# Altium PCB DevBoard.PcbDoc
Units mil, origin at the board's own origin, x right, y up, seen from the top; angles counter-clockwise.
Board outline 1377.95 x 1377.95 mil, 2 copper layers (Top, Bottom), stack 60.402 mil thick; 31 components, 23 nets, 150 pads, 24 vias.
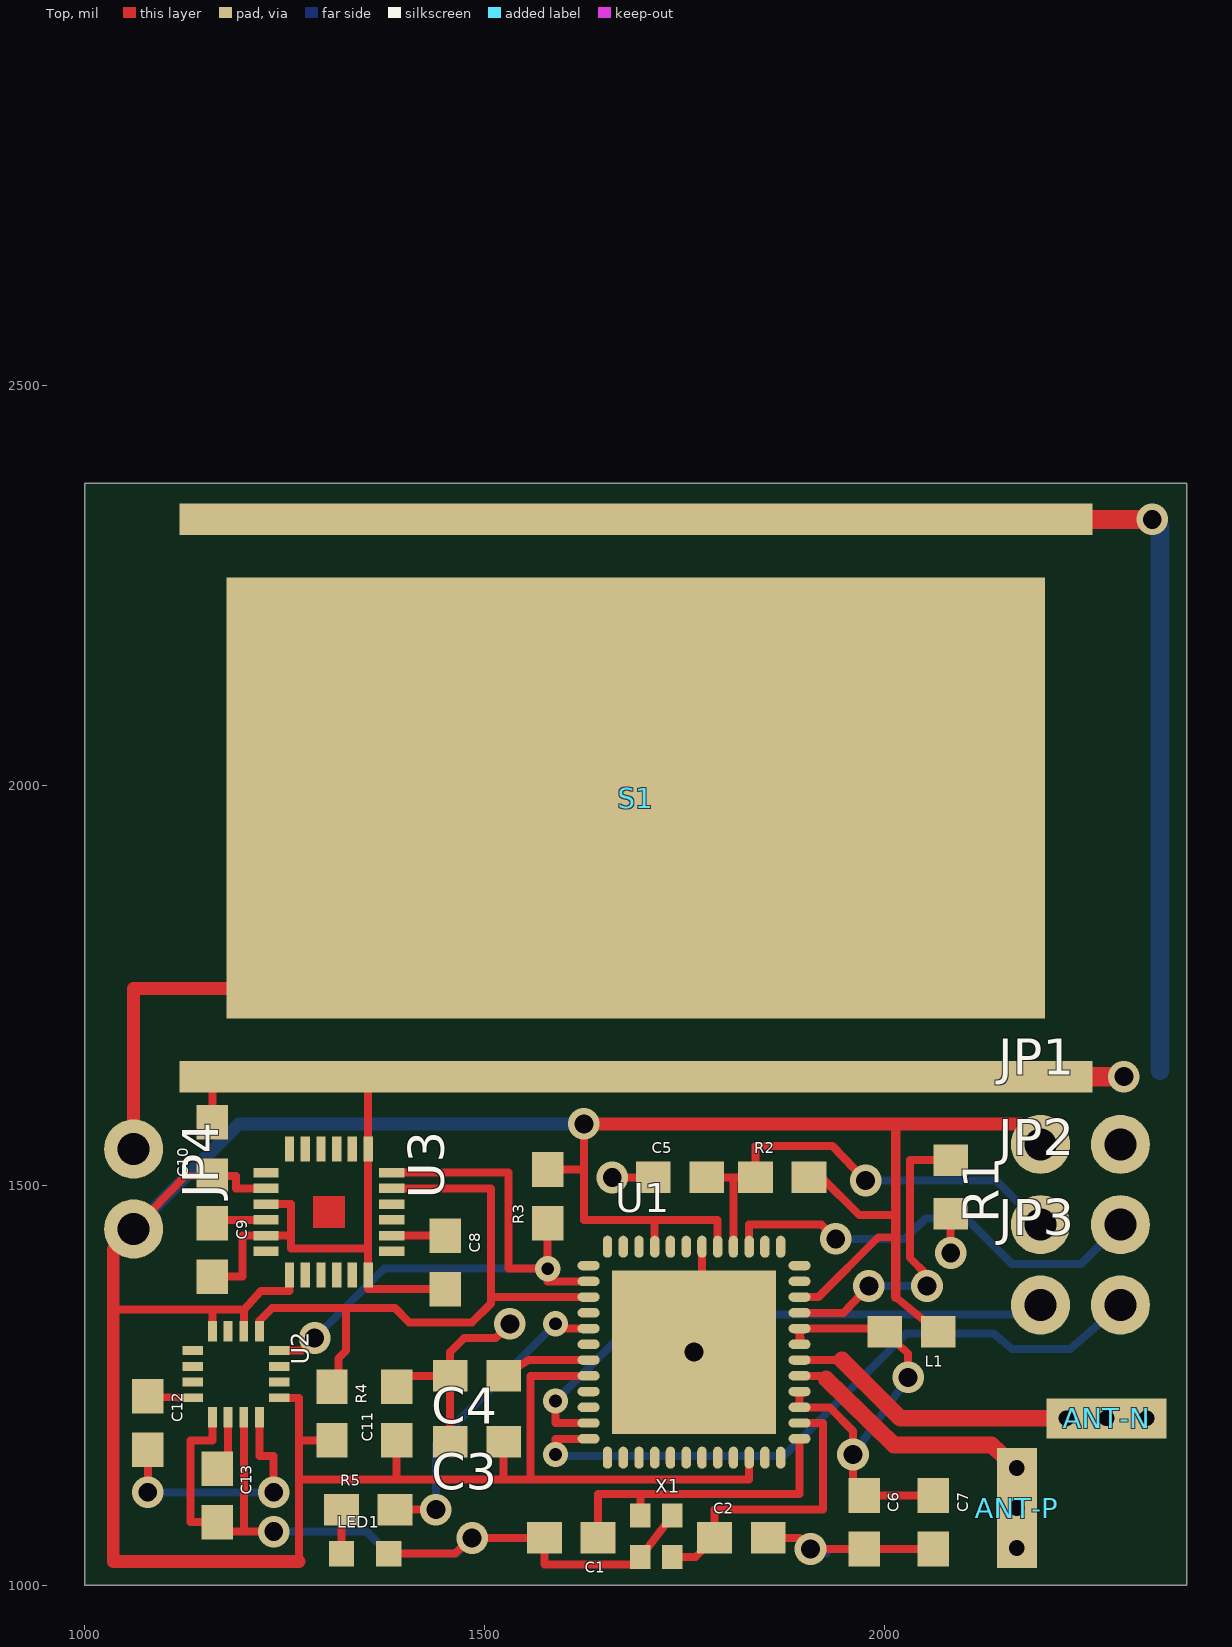
[diagram p0: Top view]
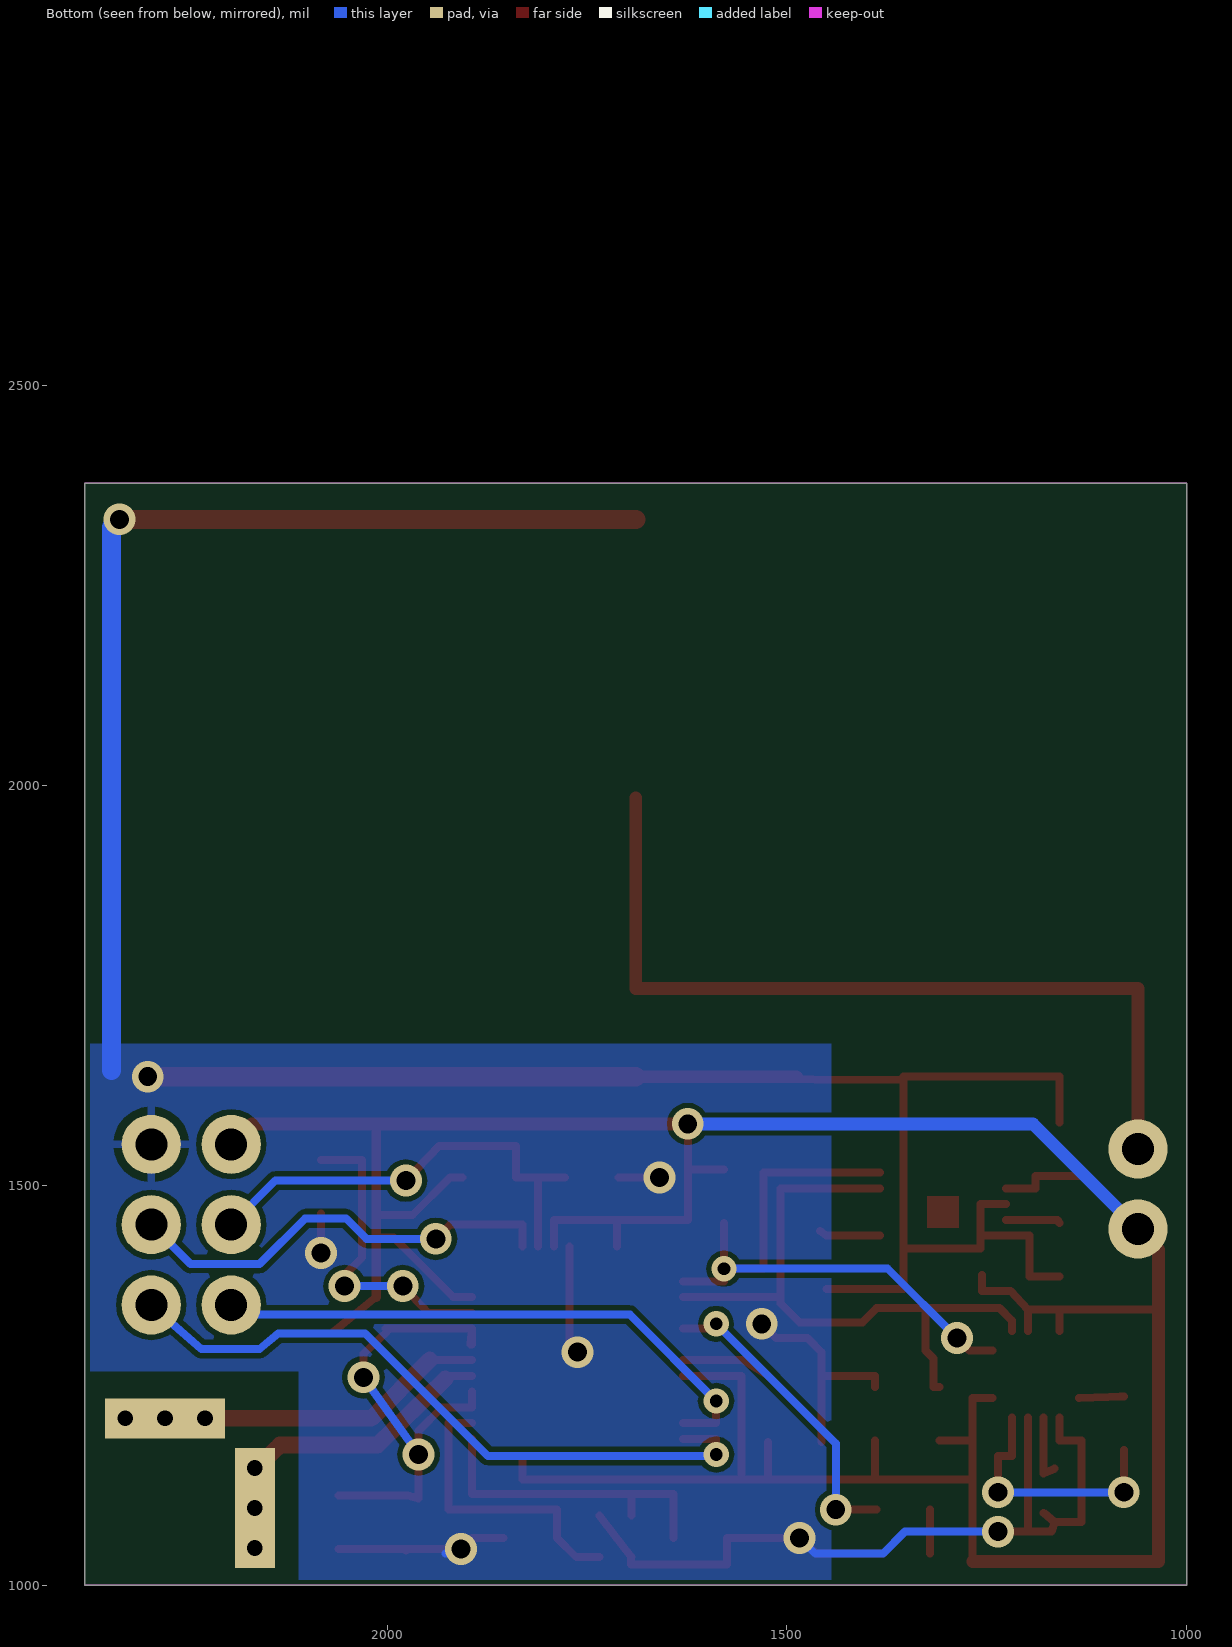
[diagram p1: Bottom view, seen from below]

## Layer stack, top to bottom
Top Solder: solder mask 0.4, Solder Resist, Dk 3.5
Top: signal copper 0.7008
Dielectric 1: core 59, FR-4, Dk 4.8
Bottom: signal copper 0.7008
Bottom Solder: solder mask 0.4, Solder Resist, Dk 3.5

## Board outline
1000,1000 2377.95,1000 2377.95,2377.95 1000,2377.95

## Design rules (kind name [scope] priority, off if disabled: settings)
Clearance [All] p1: gap=6.5 ignorepadtopadclearanceinfootprint=FALSE except(0: SMDPad-SMDPad SMDPad-THPad SMDPad-Via)
Clearance "Clearance (Same Net)" [All] p2: gap=0 ignorepadtopadclearanceinfootprint=FALSE except(6.5: SMDPad-SMDPad SMDPad-THPad SMDPad-Via)
HoleSize HoleSize_1 [All] p1: absolutevalues=TRUE maxlimit=100000 minlimit=14 maxpercent=80.000 minpercent=20.000
HoleSize [All] p2: absolutevalues=TRUE maxlimit=100 minlimit=1 maxpercent=80.000 minpercent=20.000
HoleToHoleClearance mdViaViaSameLayer [All] p1: gap=8 allowstackedmicrovias=TRUE
HoleToHoleClearance [All] p2: gap=10 allowstackedmicrovias=TRUE
PasteMaskExpansion mlMinCreamFrame [All] p1: expansion=0
PasteMaskExpansion [All] p2: expansion=0
PolygonConnect ThermalVias [IsVia] p1: connectstyle=Direct reliefconductorwidth=10 reliefentries=4 polygonreliefangle="90 Angle" airgapwidth=10
PolygonConnect [All] p2: connectstyle=Relief reliefconductorwidth=10 reliefentries=4 polygonreliefangle="90 Angle" airgapwidth=10
RoutingVias [All] p1: holewidth=28 width=50 viastyle="Through Hole" minholewidth=28 minwidth=50 maxholewidth=28 maxwidth=50
SilkToSilkClearance [All] p1 off: silktosilkclearance=10
SilkToSolderMaskClearance [IsPad] p1 off: minsilkscreentomaskgap=10 clearancetoexposedcopper=TRUE
SolderMaskExpansion mlMinStopFrame [All] p1: expansion=3
SolderMaskExpansion [All] p2: expansion=4
Width Width_1 [All] p1: maxlimit=100000 minlimit=6 preferedwidth=10
Width [All] p2: maxlimit=10 minlimit=10 preferedwidth=10
25 further rules are at their usual default settings.

## Components (designator, comment, footprint, x,y, rotation, side; value= is the part's Value field where it differs from the comment)
ANT-N "" ANTENNA 2277.56,1208.66 r180 top
ANT-P "" ANTENNA 2165.35,1096.46 r90 top
C1 "27pF" 0603-CAP 1608.27,1059.06 r180 top
C2 "27pF" 0603-CAP 1820.87,1059.06 r0 top
C3 "470nF" C0603 1490.16,1179.13 r180 top
C4 "470nF" C0603 1490.16,1261.81 r180 top
C5 "2.2nF" 0603-CAP 1744.09,1509.84 r0 top
C6 "100nF" 0603-CAP 1974.41,1078.74 r270 top
C7 "10nF" 0603-CAP 2061.02,1078.74 r270 top
C8 "2.2nF" 0603-CAP 1450.79,1403.54 r270 top
C9 "100nF" 0603-CAP 1159.45,1419.29 r270 top
C10 "10nF" 0603-CAP 1159.45,1545.28 r90 top
C11 "100nF" 0603-CAP 1389.76,1214.57 r90 top
C12 "220nF" 0603-CAP 1078.74,1202.76 r270 top
C13 "4.7uF" 0603-CAP 1165.35,1112.2 r270 top
JP1 "" 1X02 2194.88,1551.18 r0 top
JP2 "" 1X02 2194.88,1450.79 r0 top
JP3 "" 1X02 2194.88,1350.39 r0 top
JP4 "" 1X02 1061.02,1545.28 r270 top
L1 "12 nH" 0603 2033.46,1316.93 r180 top
LED1 "" LED-0603 1350.39,1039.37 r270 top
R1 "56K" R0603 2082.68,1498.03 r270 top
R2 "47K" 0603-RES 1872.05,1509.84 r0 top
R3 "4.7K" 0603-RES 1578.74,1486.22 r90 top
R4 "4.7K" 0603-RES 1309.06,1214.57 r270 top
R5 "270R" 0603-RES 1354.33,1094.49 r0 top
S1 "" TASC 1062.99,1679.13 r0 top
U1 "CC430F5137" RGZ48 1761.81,1291.34 r0 top
U2 "HMC5883LSMD" 16LPCC 1188.98,1263.78 r270 top
U3 "ITG-3200" QFN-24 1305.12,1466.54 r270 top
X1 "26 MHz" ABM11_CERAMIC-SMD-CRYSTAL 1714.57,1061.02 r90 top

## Footprints (in the part's own frame and the unit in brackets; to place one, negate y for a bottom-side part, rotate by r counter-clockwise, add the part's x,y. Pads: shape width x height; smd on the part's side, far side on the other; paste and mask are expansions set on the pad)
1X02 [mil] "1X02"
  round 74 hole 40: 1(0,0) 2(100,0)
16LPCC [mm] "16LPCC"
  rect 0.65x0.28 smd: 1(-1.37,0.75) 2(-1.37,0.25) 3(-1.37,-0.25) 4(-1.37,-0.75) 9(1.37,-0.75) 10(1.37,-0.25) 11(1.37,0.25) 12(1.37,0.75)
  rect 0.28x0.65 smd: 5(-0.75,-1.37) 6(-0.25,-1.37) 7(0.25,-1.37) 8(0.75,-1.37) 13(0.75,1.37) 14(0.25,1.37) 15(-0.25,1.37) 16(-0.75,1.37)
0603 [mm] "0603"
  rect 1.1x1 smd: 1(-0.85,0) 2(0.85,0)
0603-CAP [mm] "0603-CAP"
  rect 1.1x1 smd: 1(-0.85,0) 2(0.85,0)
0603-RES [mm] "0603-RES"
  rect 1.1x1 smd: 1(-0.85,0) 2(0.85,0)
ABM11_CERAMIC-SMD-CRYSTAL [mil] "ABM11_CERAMIC-SMD-CRYSTAL"
  rect 30x26 smd: P$1(26,20) P$2(26,-20) P$3(-26,-20) P$4(-26,20)
ANTENNA [mil] "ANTENNA"
  rect 50x50 hole 19.69: IN1(50,0) IN2(0,0) IN3(-50,0)
C0603 [mm] "C0603"
  rect 1.1x1 smd: 1(-0.85,0) 2(0.85,0)
LED-0603 [mil] "LED-0603"
  rect 31.5x31.5 smd: A(0,-29.53) C(0,29.53)
QFN-24 [mil] "QFN-24"
  rect 31.5x11.81 smd: 1(-78.74,49.21) 2(-78.74,29.53) 3(-78.74,9.84) 4(-78.74,-9.84) 5(-78.74,-29.53) 6(-78.74,-49.21) 13(78.74,-49.21) 14(78.74,-29.53) 15(78.74,-9.84) 16(78.74,9.84) 17(78.74,29.53) 18(78.74,49.21)
  rect 11.81x31.5 smd: 7(-49.21,-78.74) 8(-29.53,-78.74) 9(-9.84,-78.74) 10(9.84,-78.74) 11(29.53,-78.74) 12(49.21,-78.74) 19(49.21,78.74) 20(29.53,78.74) 21(9.84,78.74) 22(-9.84,78.74) 23(-29.53,78.74) 24(-49.21,78.74)
  Top region: -19.69,-19.69 -19.69,19.69 19.69,19.69 19.69,-19.69
R0603 [mm] "R0603"
  rect 1x1.1 smd: 1(-0.85,0) 2(0.85,0)
RGZ48 [mm] "RGZ48"
  rrect100% 0.7x0.3 smd: 1(-3.35,2.75) 2(-3.35,2.25) 3(-3.35,1.75) 4(-3.35,1.25) 5(-3.35,0.75) 6(-3.35,0.25) 7(-3.35,-0.25) 8(-3.35,-0.75) 9(-3.35,-1.25) 10(-3.35,-1.75) 11(-3.35,-2.25) 12(-3.35,-2.75) 25(3.35,-2.75) 26(3.35,-2.25) 27(3.35,-1.75) 28(3.35,-1.25) 29(3.35,-0.75) 30(3.35,-0.25) 31(3.35,0.25) 32(3.35,0.75) 33(3.35,1.25) 34(3.35,1.75) 35(3.35,2.25) 36(3.35,2.75)
  rrect100% 0.3x0.7 smd: 13(-2.75,-3.35) 14(-2.25,-3.35) 15(-1.75,-3.35) 16(-1.25,-3.35) 17(-0.75,-3.35) 18(-0.25,-3.35) 19(0.25,-3.35) 20(0.75,-3.35) 21(1.25,-3.35) 22(1.75,-3.35) 23(2.25,-3.35) 24(2.75,-3.35) 37(2.75,3.35) 38(2.25,3.35) 39(1.75,3.35) 40(1.25,3.35) 41(0.75,3.35) 42(0.25,3.35) 43(-0.25,3.35) 44(-0.75,3.35) 45(-1.25,3.35) 46(-1.75,3.35) 47(-2.25,3.35) 48(-2.75,3.35)
  rect 5.2x5.2 smd: TP(0,0)
TASC [mm] "TASC"
  rect 29x1 smd: MINUS1(15.9,16.6) MINUS2(15.9,-1.1)
  rect 26x14 smd: PLUS(15.9,7.75)

## Part data
ANT-N ANT-P: library part ANTENNA
C1 C2 C5 C6 C7 C8 C9 C10 C11 C12 C13: library part 0603-CAP
C3 C4: library part C0603
JP1 JP2 JP3 JP4: library part 1X02
L1: library part 0603
LED1: library part LED-0603
R1: library part R0603
R2 R3 R4 R5: library part 0603-RES
S1: library part TASC
U1: library part RGZ48
U2: library part 16LPCC
U3: library part QFN-24
X1: library part ABM11_CERAMIC-SMD-CRYSTAL

## Via types
v1: diameter 39.62/39.62 (per signal layer), hole 23.62, Top to Bottom, 20 vias
v2: diameter 31.75/31.75 (per signal layer), hole 15.75, Top to Bottom, 4 vias

## Nets (pads, with @x,y where several pads share a name; then routed paths per layer and width w, separated by ;. In a path a pad name is that pad's centre, name@x,y a point inside that pad or via, vN(x,y) a via of type N, cw(c..) or ccw(c..) an arc to the next point about the centre after c; other vN are vias at no path point)
GND: C1.2 C2.2 C3.2 C4.2 C5.1 C6.2 C7.2 C8.2 C9.2 C10.2 C11.2 C13.2 JP1.2 LED1.C R1.2 S1.MINUS1 S1.MINUS2 U1.42 U1.TP U2.9 U2.11 U3.1 U3.9 U3.11 U3.18 X1.P$2 X1.P$4 | length 5988.4
  Top w10: U2.9 1159.45,1181.1 1131.89,1181.1 1131.89,1078.74 C13.2 ; C9.2 1196.85,1385.83 1196.85,1437.01 U3.11 1257.87,1437.01 ; C10.2 1159.45,1635.83 1354.33,1635.83 S1.MINUS2@1354.33,1631.89 ; C13.2@1179.13,1090.55 C13.2 ; U2.11 1198.82,1066.93 ; U3.9 1257.87,1476.38 1257.87,1437.01 ; v1(1236.22,1066.93) 1198.82,1066.93 ; LED1.C 1462.6,1039.37 v1(1484.25,1059.06) C1.2 1574.8,1025.59 1694.88,1025.59 X1.P$4@1694.88,1035.43 ; C11.2 1389.76,1261.81 C4.2 ; C8.2 1354.33,1370.08 U3.18 1354.33,1421.26 ; C3.2 C4.2 ; v1(1531.5,1326.77) 1513.78,1309.06 1474.41,1309.06 1456.69,1291.34 C4.2 ; v1(1659.45,1509.84) C5.1 ; X1.P$4 X1.P$4@1694.88,1035.43 ; X1.P$2 X1.P$4@1694.88,1035.43 ; v1(1761.81,1291.34) 1771.65,1291.34 U1.42 ; C2.2 1893.7,1059.06 v1(1907.48,1045.28) C6.2 ; C6.2@1976.38,1043.31 C6.2 ; C7.2 C6.2 ; v1(2082.68,1415.35) R1.2 ; v1@2297.24,1635.83 1688.98,1633.29 S1.MINUS2@1354.33,1631.89 ; C13.2 1169.29,1066.93 1198.82,1066.93 ; 1257.87,1437.01 1257.87,1421.26 1354.33,1421.26 ; 1354.33,1421.26 U3.1 S1.MINUS2@1354.33,1631.89
  Top w16: S1.MINUS2@1488.19,1635.83 S1.MINUS2
  Top w24: S1.MINUS2 2297.24,1635.83 v1(2299.21,1635.83) ; S1.MINUS1 v1(2334.65,2332.68)
  Bottom w10: v1(1236.22,1066.93) 1352.36,1066.93 1379.92,1039.37 1464.57,1039.37 v1(1484.25,1059.06) 1470.47,1053.15 v1@1470.47,1055.12 ; v1(1659.45,1509.84) 1645.67,1513.78 1657.26,1506.4 v1@1667.32,1500 ; v1(1907.48,1045.28) 1927.17,1039.37
  Bottom w24: v1(2334.65,2332.68) 2344.49,2322.83 2344.49,1643.7
N$1: C2.1 U1.26 X1.P$3 | length 371.9
  Top w10: X1.P$3 1763.37,1035.02 C2.1 1787.4,1094.49 1923.23,1094.49 1923.23,1202.76 U1.26
N$2: C1.1 U1.25 X1.P$1 | length 403.3
  Top w10: C1.1 1641.73,1114.17 1694.88,1114.17 ; X1.P$1 1694.57,1113.86 1694.88,1114.17 ; U1.25 1893.7,1114.17 1694.88,1114.17
N$3: R1.1 U1.33 | length 391.5
  Top w10: U1.33 1948.82,1340.55 v1(1980.32,1374.02) ; v1(2053.15,1374.02) 2053.15,1387.8 2031.5,1409.45 2031.5,1531.5 R1.1
  Bottom w10: v1(1980.32,1374.02) v1(2053.15,1374.02)
N$4: C4.1 U1.7 | length 111.9
  Top w10: C4.1 1555.12,1281.5 U1.7
N$5: C12.1 U2.8 | length 60.3
  Top w10: C12.1@1082.68,1236.22 C12.1 U2.8
N$6: C12.2 U2.12 | length 322
  Top w10: v1(1078.74,1116.14) C12.2 ; U2.12 1218.5,1161.42 1236.22,1161.42 v1(1236.22,1116.14)
  Bottom w10: v1(1078.74,1116.14) v1(1236.22,1116.14)
N$7: C13.1 U2.10 | length 85.1
  Top w10: C13.1 1179.13,1139.76 U2.10
N$8: C8.1 U3.20 | length 76.8
  Top w10: U3.20 C8.1 C8.1@1458.66,1442.91
N$9: C9.1 U3.10 | length 69.4
  Top w10: C9.1 1161.42,1456.69 U3.10
N$10: R5.2 U1.5 | length 389.2
  Top w10: R5.2 v1(1438.98,1094.49) ; v2(1588.58,1326.77) 1594.49,1320.87 U1.5
  Bottom w10: v1(1438.98,1094.49) 1438.98,1177.17 v2(1588.58,1326.77)
N$11: LED1.A R5.1 | length 55.1
  Top w10: LED1.A R5.1
RFN: ANT-N.IN1 ANT-N.IN2 ANT-N.IN3 U1.30 | length 464
  Top w10: U1.30 1946.85,1281.5
  Top w20.87: 1946.85,1281.5 2019.69,1208.66 ANT-N.IN1 ANT-N.IN2 ANT-N.IN3
RFP: ANT-P.IN1 ANT-P.IN2 ANT-P.IN3 U1.29 | length 418.6
  Top w10: U1.29 1923.23,1261.81 1927.17,1257.87 ; ANT-P.IN1@2165.35,1145.67 ANT-P.IN1
  Top w20.87: 1927.17,1257.87 2011.81,1175.2 2133.86,1175.2 2165.35,1145.67 ANT-P.IN2 ANT-P.IN3
RST: C5.2 JP2.1 R2.1 U1.40 | length 614.2
  Top w10: C5.2 R2.1 ; U1.40 1811.02,1509.84 R2.1 ; R2.1@1838.58,1511.81 R2.1 ; v1(1976.38,1505.91) 1935.04,1549.21 1838.58,1549.21 R2.1
  Bottom w10: v1(1976.38,1505.91) 2139.76,1505.91 JP2.1
RXD: JP3.2 U1.12 | length 859.8
  Top w10: v2(1588.58,1163.39) 1588.58,1183.07 U1.12
  Bottom w10: v2(1588.58,1163.39) 1590.55,1161.42 1874.02,1161.42 2027.56,1314.96 2135.83,1314.96 2159.45,1295.28 2232.28,1295.28 2294.88,1350 JP3.2
SCL: R4.1 U1.3 U2.1 U3.23 | length 826.1
  Top w10: U2.1 1218.5,1330.71 1234.25,1346.46 1326.77,1346.46 ; R4.1 1316.93,1248.03 1316.93,1283.46 1326.77,1293.31 1326.77,1346.46 ; U3.23 1507.87,1496.06 1507.87,1360.24 ; U1.3 1507.87,1360.24 ; 1326.77,1346.46 1387.8,1346.46 1405.51,1328.74 1484.25,1328.74 1507.87,1352.36 1507.87,1360.24
SDA: R3.1 U1.2 U2.16 U3.24 | length 817.2
  Top w10: U2.16 1271.65,1293.31 v1(1287.4,1309.06) ; U3.24 1529.53,1515.75 1529.53,1395.67 v2(1578.74,1395.67) ; R3.1 v2(1578.74,1395.67) ; U1.2 1578.74,1379.92 v2(1578.74,1395.67)
  Bottom w10: v1(1287.4,1309.06) 1374.02,1395.67 v2(1578.74,1395.67)
TEST: JP2.2 U1.39 | length 553.7
  Top w10: U1.39 1830.71,1450.79 1921.26,1450.79 v1(1938.98,1433.07)
  Bottom w10: v1(1938.98,1433.07) 2025.59,1433.07 2051.18,1458.66 2102.36,1458.66 2159.45,1401.57 2245.67,1401.57 JP2.2
TXD: JP3.1 U1.11 | length 724.9
  Top w10: v2(1588.58,1230.32) 1588.58,1202.76 U1.11
  Bottom w10: v2(1588.58,1230.32) 1696.54,1338.27 1698.22,1338.27 1698.53,1338.58 2183.07,1338.58 JP3.1
VCC: C3.1 C10.1 C11.1 JP1.1 JP4.2 L1.1 R2.2 R3.2 R4.2 U1.8 U1.22 U1.34 U1.41 U1.45 U2.2 U2.4 U2.13 U3.8 U3.13 | length 4498.1
  Top w10: 1035.43,1344.49 1159.45,1344.49 ; JP4.2 1061.02,1444.88 1125.98,1511.81 C10.1 1188.98,1511.81 1188.98,1496.06 U3.8 ; U2.4 1159.45,1344.49 ; U2.2 1198.82,1344.49 ; U2.13 1267.72,1234.25 1267.72,1181.1 ; U3.13 1255.91,1368.11 1220.47,1368.11 1198.82,1344.49 ; 1267.72,1029.53 1267.72,1131.89 ; R4.2 1267.72,1181.1 ; C11.1 1389.76,1131.89 ; C3.1 1523.62,1131.89 ; R3.2 1624.02,1519.69 ; v1(1624.02,1576.77) 1624.02,1519.69 ; U1.8 1557.09,1261.81 1557.09,1131.89 ; U1.45 1712.6,1456.69 ; U1.41 1791.34,1456.69 1712.6,1456.69 ; U1.22 1830.71,1131.89 1557.09,1131.89 ; U1.34 1917.32,1360.24 1992.13,1435.04 2011.81,1435.04 2013.78,1433.07 ; R2.2 1921.26,1509.84 1968.5,1462.6 2009.84,1462.6 2013.78,1466.54 ; 2013.78,1360.24 L1.1 ; 1159.45,1344.49 1198.82,1344.49 ; 1267.72,1131.89 1267.72,1181.1 ; 1267.72,1131.89 1389.76,1131.89 ; 1389.76,1131.89 1523.62,1131.89 ; 1523.62,1131.89 1557.09,1131.89 ; 1624.02,1519.69 1624.02,1456.69 1712.6,1456.69
  Top w12: 2013.78,1360.24 2013.78,1433.07 2013.78,1466.54 2013.78,1576.77
  Top w16: JP4.2 1035.43,1419.69 1035.43,1344.49 1035.43,1029.53 1267.72,1029.53 ; v1(1624.02,1576.77) 2013.78,1576.77 2169.29,1576.77 JP1.1
  Bottom w16: JP4.2 1192.52,1576.77 v1(1624.02,1576.77)
VCCRF: C6.1 C7.1 L1.2 U1.27 U1.28 U1.31 U1.32 | length 625
  Top w10: U1.28 U1.27 1931.1,1222.44 1960.63,1192.91 v1(1960.63,1163.39) 1960.63,1108.27 C6.1 C7.1 ; U1.31 U1.32 ; U1.31@1895.67,1301.18 U1.32 ; v1(2029.53,1259.84) 2029.53,1289.37 L1.2 2001.97,1320.87 U1.32
  Bottom w10: v1(1960.63,1163.39) v1(2029.53,1259.84)
VSOLAR: JP4.1 S1.PLUS | length 1066.9
  Top w16: JP4.1 1061.02,1746.06 1688.98,1746.06 S1.PLUS
pads on no net: U1.1 U1.4 U1.6 U1.9 U1.10 U1.13 U1.14 U1.15 U1.16 U1.17 U1.18 U1.19 U1.20 U1.21 U1.23 U1.24 U1.35 U1.36 U1.37 U1.38 U1.43 U1.44 U1.46 U1.47 U1.48 U2.3 U2.5 U2.6 U2.7 U2.14 U2.15 U3.2 U3.3 U3.4 U3.5 U3.6 U3.7 U3.12 U3.14 U3.15 U3.16 U3.17 U3.19 U3.21 U3.22

## Polygon pours and split planes (outlines as drawn)
GND on Bottom "Bottom-GND" (solid, remove dead copper, pour order 0): 1444.76,1677.29 1444.76,992 2110.36,992 2110.36,1267.59 2385.99,1267.59 2383.94,1677.29

## Keep-outs
Keep-Out Layer:
  the board outline again, w0

## Silkscreen, mask and mechanical layers (free items; w line width, h text height)
Dimension:
  the board outline again, w0

## Text inside footprints (layer, text, board x,y; h text height)
U3: Assembly Top "X" at 1274.02,1407.97 h24.8 r90; Assembly Top "Y" at 1347.02,1500.02 h24.8 r90; Assembly Top "Z" at 1355.02,1453.98 h24.8 r90